# Altium PCB MM5800.PcbDoc
Units mil, origin at the board's own origin, x right, y up, seen from the top; angles counter-clockwise.
Board outline 6000 x 4000 mil, 2 copper layers (Top Layer, Bottom Layer); 1 components, 0 nets, 14 pads, 0 vias.
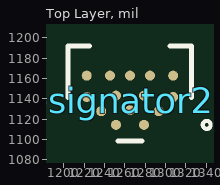
[diagram p0: Top Layer view]
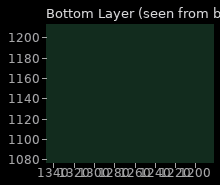
[diagram p1: Bottom Layer view, seen from below]

## Layer stack, top to bottom
Top Solder: solder mask 0.4, Solder Resist, Dk 3.5
Top Layer: signal copper 1.4
Dielectric 1: dielectric 12.6, FR-4, Dk 4.8
Bottom Layer: signal copper 1.4
Bottom Solder: solder mask 0.4, Solder Resist, Dk 3.5

## Board outline
1000,1000 7000,1000 7000,5000 1000,5000

## Design rules (kind name [scope] priority, off if disabled: settings)
Clearance [All] p1: gap=10 ignorepadtopadclearanceinfootprint=FALSE
PolygonConnect [All] p1: connectstyle=Relief reliefconductorwidth=10 reliefentries=4 polygonreliefangle="90 Angle" airgapwidth=10
RoutingVias [All] p1: holewidth=28 width=50 viastyle="Through Hole" minholewidth=28 minwidth=50 maxholewidth=28 maxwidth=50
SolderMaskExpansion [All] p1: expansion=4 istentingtop=FALSE
Width [All] p1: maxlimit=10 minlimit=10 preferedwidth=10
30 further rules are at their usual default settings.

## Components (designator, comment, footprint, x,y, rotation, side; value= is the part's Value field where it differs from the comment)
Designator237 "Comment" MM5800 1265,1145 r0 top

## Footprints (in the part's own frame and the unit in brackets; to place one, negate y for a bottom-side part, rotate by r counter-clockwise, add the part's x,y. Pads: shape width x height; smd on the part's side, far side on the other; paste and mask are expansions set on the pad)
MM5800 [mm]
  round 0.25 smd paste-0.035 mask-0.025: A1(-1.08,0.452) A2(-0.5,0.452) A3(0,0.452) A4(0.5,0.452) A5(1.08,0.452) B1(-1.08,-0.083) B2(-0.35,-0.048) B3(0.35,-0.048) B4(1.08,-0.083) C1(-0.718,-0.438) C2(0,-0.413) C3(0.718,-0.438) D1(-0.35,-0.778) D2(0.35,-0.778)
  silkscreen extent -1.54,-1.18 2.02,1.19, body extent -1.71,-1.33 1.7,1.37, height 1.5

## Nets (pads, with @x,y where several pads share a name; then routed paths per layer and width w, separated by ;. In a path a pad name is that pad's centre, name@x,y a point inside that pad or via, vN(x,y) a via of type N, cw(c..) or ccw(c..) an arc to the next point about the centre after c; other vN are vias at no path point)
pads on no net: Designator237.A1 Designator237.A2 Designator237.A3 Designator237.A4 Designator237.A5 Designator237.B1 Designator237.B2 Designator237.B3 Designator237.B4 Designator237.C1 Designator237.C2 Designator237.C3 Designator237.D1 Designator237.D2